# EAGLE board femto (EAGLE 6.4)
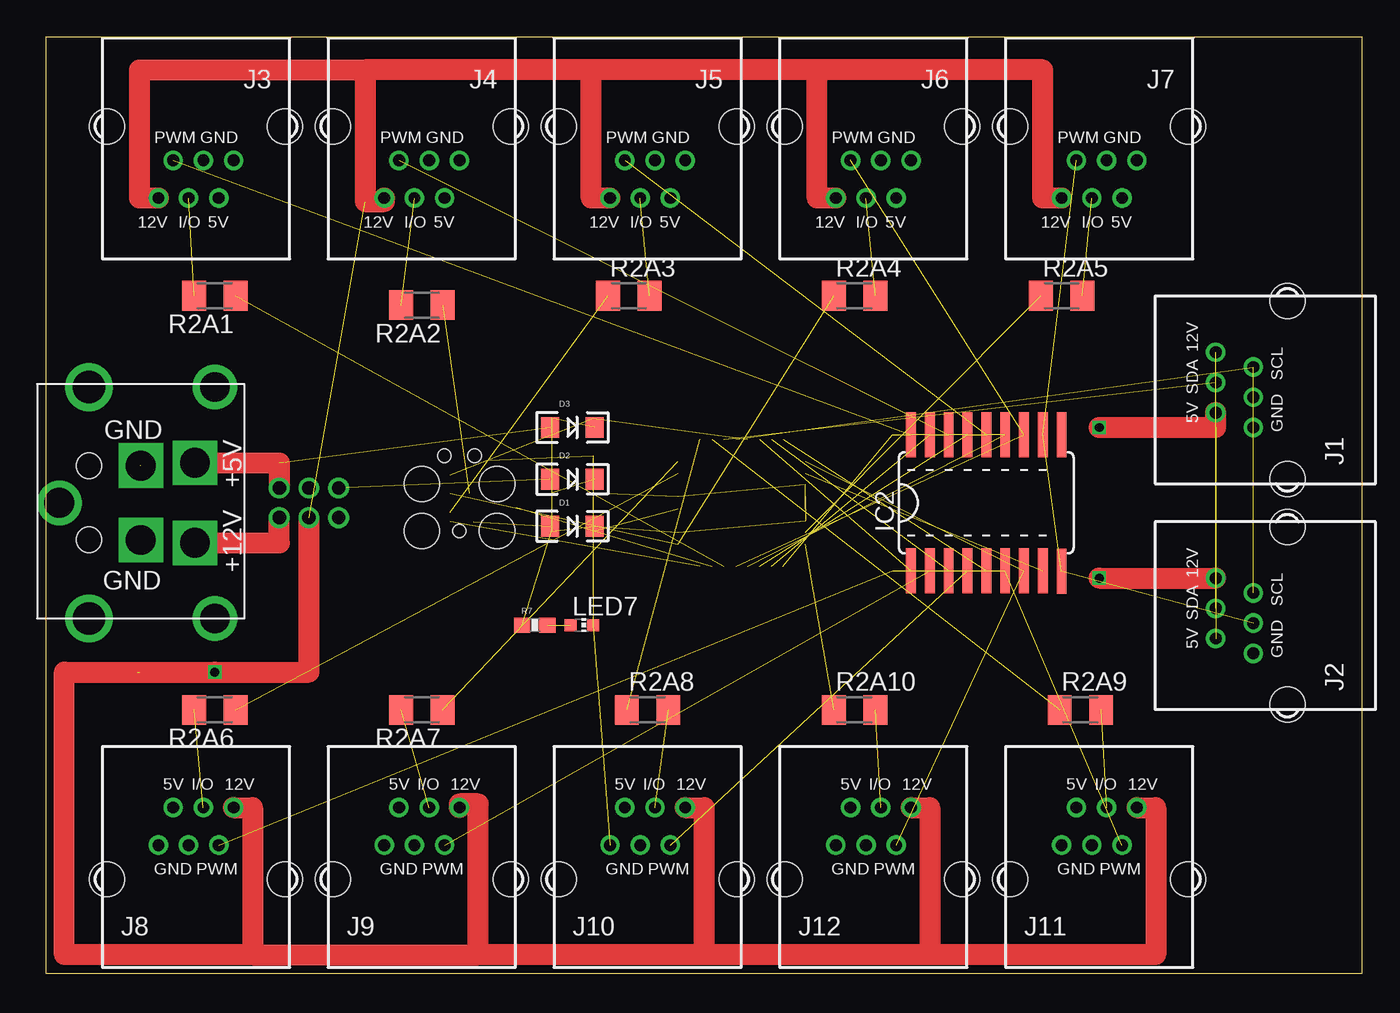
[diagram p0: board, top side]
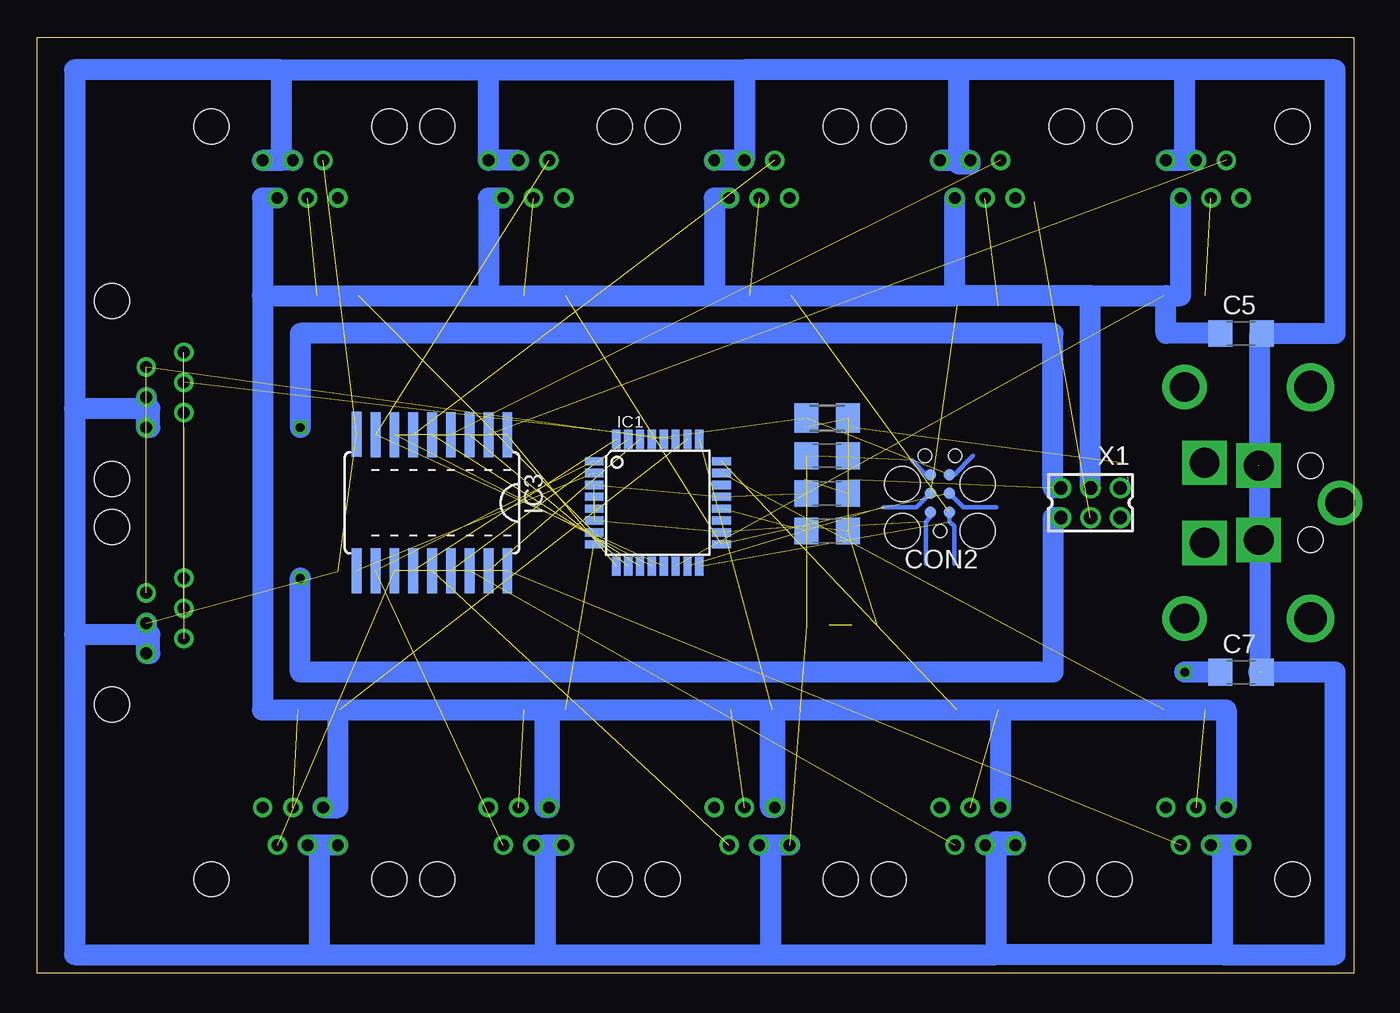
[diagram p1: board, bottom side, seen from below]

Size 88.89 x 63.17 mm. Coordinates in mm from the lower left corner, seen from the top.
Outline: 0,0 88.89,0 88.89,63.17 0,63.17 0,0
Copper layers (1*16): Top 0.035mm / dielectric 1.5mm / Bottom 0.035mm
Design rules "default": minimum track width 6mil, minimum drill 12mil, track to track 6mil, track to pad 6mil, pad to pad 6mil, via to via 6mil, smd to smd 0mil, copper to edge 10mil, drill to drill 10mil, minimum pad ring 10mil, minimum via ring 6mil, stop-mask expansion 2mil, vias tented up to drill 100mil, thermal gap 10mil
Net classes: 0 default: width 0.457 mm; 1 power: width 0.457 mm; 2 highpower: width 0.457 mm; 3 fine: width 0.305 mm
vRestrict: area 40.6,25.4 to 44.5,38.1; area 49.5,25.4 to 53.3,38.1; area 40.6,25.4 to 53.3,29.2; area 40.6,34.3 to 53.3,38.1; area 25.4,29.2 to 30.5,35.6; area 55.9,24.1 to 69.8,39.4

## Footprints (pad centres in the part's own frame; a part is rotated, then mirrored left to right if it is on the bottom)
C1206 = smd 1.6 x 1.8: 1 -1.4,0; 2 1.4,0
TC2030-MCP = smd 0.787 x 0.787: 5V 1.27,0.635; GND 3.81,0.635; MISO 1.27,-0.635; MOSI 2.54,0.635; RESET 3.81,-0.635; SCK 2.54,-0.635 | hole 0.889: 0,0; 5.08,-1.016; 5.08,1.016 | hole 2.375: 0,2.54; 0,-2.54; 3.175,-2.54; 3.175,2.54
LED-1206 = smd 1.2 x 1.4: A -1.5,0; C 1.5,0
TQFP32-08 = smd 1.27 x 0.559: 1 -4.293,2.8; 2 -4.293,2; 3 -4.293,1.2; 4 -4.293,0.4; 5 -4.293,-0.4; 6 -4.293,-1.2; 7 -4.293,-2; 8 -4.293,-2.8; 17 4.293,-2.8; 18 4.293,-2; 19 4.293,-1.2; 20 4.293,-0.4; 21 4.293,0.4; 22 4.293,1.2; 23 4.293,2; 24 4.293,2.8 | smd 0.559 x 1.27: 9 -2.8,-4.293; 10 -2,-4.293; 11 -1.2,-4.293; 12 -0.4,-4.293; 13 0.4,-4.293; 14 1.2,-4.293; 15 2,-4.293; 16 2.8,-4.293; 25 2.8,4.293; 26 2,4.293; 27 1.2,4.293; 28 0.4,4.293; 29 -0.4,4.293; 30 -1.2,4.293; 31 -2,4.293; 32 -2.8,4.293
SO18W = smd 0.66 x 3.048: 1 -5.08,-4.585; 2 -3.81,-4.585; 3 -2.54,-4.585; 4 -1.27,-4.585; 5 0,-4.585; 6 1.27,-4.585; 7 2.54,-4.585; 8 3.81,-4.585; 9 5.08,-4.623; 10 5.08,4.585; 11 3.81,4.585; 12 2.54,4.585; 13 1.27,4.585; 14 0,4.585; 15 -1.27,4.585; 16 -2.54,4.585; 17 -3.81,4.585; 18 -5.08,4.585
RJ12-RIGHTANGLE-I2C = drill 0.8 pad 1.3: +5V -1.54,4.84; +12V 2.54,4.84; GND1 -2.54,2.3; GND2 -0.5,2.3; SCL 1.54,2.3; SDA 0.5,4.84 | hole 2.36: -6,0; 6,0
RJ12-RIGHTANGLE = drill 0.8 pad 1.3: +5V -1.54,4.84; +12V 2.54,4.84; GND1 -2.54,2.3; GND2 -0.5,2.3; I/O 0.5,4.84; PWM 1.54,2.3 | hole 2.36: -6,0; 6,0
CHIP-LED0603 = smd 0.8 x 0.8: A 0,-0.75; C 0,0.75
M1206 = smd 1.6 x 2: 1 -1.4,0; 2 1.4,0
0603-RES = smd 1.1 x 1: 1 -0.85,0; 2 0.85,0
KPJX-4S-S = drill 2 square: +5V 2.7,1.35; +12V -2.7,1.35; GND1 -2.5,5; GND2 2.5,5 | drill 2: P$1 -7.8,0; P$2 7.8,0; P$11 0,10.5 | drill 2.2: P$3 -7.8,8.5; P$4 7.8,8.5 | hole 1.7: -2.5,8.5; 2.5,8.5
87758-0616 = drill 0.9 pad 1.27: 1 -2,-1; 2 -2,1; 3 0,-1; 4 0,1; 5 2,-1; 6 2,1

## Placement (x,y rotation side)
C1  0.1uF  [C1206]  35.56,29.84 180 bottom
C2  0.1uF  [C1206]  35.56,32.38 180 bottom
C3  10uF  [C1206]  35.56,34.92 180 bottom
C5  10uF  [C1206]  7.62,43.18 0 bottom
C7  10uF  [C1206]  7.62,20.32 0 bottom
CON2  [TC2030-MCP]  27.94,29.84 90 bottom
D1  1N581D1206  [LED-1206]  35.56,30.16 0 top
D2  1N581D1206  [LED-1206]  35.56,33.34 0 top
D3  1N581D1206  [LED-1206]  35.56,36.83 0 top
IC1  MEGA8-AI  [TQFP32-08]  46.99,31.75 0 bottom
IC2  [SO18W]  63.5,31.75 0 top
IC3  [SO18W]  62.23,31.75 180 bottom
J1  RJ12RIGHTANGLE-I2C  [RJ12-RIGHTANGLE-I2C]  83.82,39.37 90 top
J2  RJ12RIGHTANGLE-I2C  [RJ12-RIGHTANGLE-I2C]  83.82,24.13 90 top
J3  RJ12RIGHTANGLE  [RJ12-RIGHTANGLE]  10.16,57.15 180 top
J4  RJ12RIGHTANGLE  [RJ12-RIGHTANGLE]  25.4,57.15 180 top
J5  RJ12RIGHTANGLE  [RJ12-RIGHTANGLE]  40.64,57.15 180 top
J6  RJ12RIGHTANGLE  [RJ12-RIGHTANGLE]  55.88,57.15 180 top
J7  RJ12RIGHTANGLE  [RJ12-RIGHTANGLE]  71.12,57.15 180 top
J8  RJ12RIGHTANGLE  [RJ12-RIGHTANGLE]  10.16,6.35 0 top
J9  RJ12RIGHTANGLE  [RJ12-RIGHTANGLE]  25.4,6.35 0 top
J10  RJ12RIGHTANGLE  [RJ12-RIGHTANGLE]  40.64,6.35 0 top
J11  RJ12RIGHTANGLE  [RJ12-RIGHTANGLE]  71.12,6.35 0 top
J12  RJ12RIGHTANGLE  [RJ12-RIGHTANGLE]  55.88,6.35 0 top
LED7  [CHIP-LED0603]  36.2,23.5 270 top
R2A1  1k  [M1206]  11.43,45.72 180 top
R2A2  1k  [M1206]  25.4,45.09 180 top
R2A3  1k  [M1206]  39.37,45.72 0 top
R2A4  1k  [M1206]  54.61,45.72 0 top
R2A5  1k  [M1206]  68.58,45.72 0 top
R2A6  1k  [M1206]  11.43,17.78 180 top
R2A7  1k  [M1206]  25.4,17.78 180 top
R2A8  1k  [M1206]  40.64,17.78 0 top
R2A9  1k  [M1206]  69.85,17.78 0 top
R2A10  1k  [M1206]  54.61,17.78 0 top
R7  10k  [0603-RES]  33.02,23.5 0 top
R8  10k  [M1206]  35.56,37.47 0 bottom
U$1  KPJX-4S-S  [KPJX-4S-S]  11.43,31.75 90 top
X1  87758-0616  [87758-0616]  17.78,31.75 180 bottom

## Library data of the parts
C1-C3 R2A1-R2A10 R8 = resistor
C5 C7 = rcl
CON2 D1-D3 IC2 IC3 J1-J12 U$1 = lpatiny
IC1 = atmel; MPN: ATMEGA8-16AU; OC_FARNELL: 9171371; OC_NEWARK: 73M8863
LED7 = adafruit
R7 = SparkFun
X1 = con-molex; MPN: 87758-0616; OC_FARNELL: 7472323; OC_NEWARK: 25M5667

## Nets
5V_ISCP: CON2.5V D1.A
5V_UC [power]: C1.1 C2.1 C3.1 D1.C D2.C D3.C IC1.4 IC1.6 IC1.18 R7.1 R8.2
+5V [power]: C5.1 J3.+5V J4.+5V J5.+5V J6.+5V J7.+5V J8.+5V J9.+5V J10.+5V J11.+5V J12.+5V X1.3
+12V: C7.1 J3.+12V J4.+12V J5.+12V J6.+12V J7.+12V J8.+12V J9.+12V J10.+12V J11.+12V J12.+12V X1.4
A0: IC1.23 R2A6.1
A1: IC1.24 R2A7.1
A2: IC1.25 R2A8.1
A3: IC1.26 R2A9.1
A6: IC1.19
A7: IC1.22
D0: IC1.30 IC2.1 IC2.2
D1: IC1.31 IC2.3 IC2.4
D2: IC1.32 IC2.5 IC2.6
D3: IC1.1 IC2.7
D4: IC1.2 IC2.8
D5: IC1.9 IC3.1 IC3.2
D6: IC1.10 IC3.3 IC3.4
D7: IC1.11 IC3.5 IC3.6
D8: IC1.12 IC3.7
D9: IC1.13 IC3.8
D10: IC1.14 R2A1.1
EXT-5V [highpower]: D3.A U$1.+5V X1.1
EXT-12V [highpower]: U$1.+12V X1.2
GND [power]: C2.2 C3.2 C5.2 C7.2 CON2.GND IC1.3 IC1.5 IC1.21 IC2.9 IC3.9 J1.GND1 J1.GND2 J2.GND1 J2.GND2 J3.GND1 J3.GND2 J4.GND1 J4.GND2 J5.GND1 J5.GND2 J6.GND1 J6.GND2 J7.GND1 J7.GND2 J8.GND1 J8.GND2 J9.GND1 J9.GND2 J10.GND1 J10.GND2 J11.GND1 J11.GND2 J12.GND1 J12.GND2 LED7.C U$1.GND1 U$1.GND2
I2C-5V [power]: D2.A J1.+5V J2.+5V X1.5
I2C-12V: J1.+12V J2.+12V X1.6
MISO: CON2.MISO IC1.16 R2A3.1
MOSI: CON2.MOSI IC1.15 R2A2.1
N$2: J3.I/O R2A1.2
N$3: IC2.17 IC2.18 J3.PWM
N$4: C1.2 IC1.20
N$5: IC2.15 IC2.16 J4.PWM
N$6: IC2.13 IC2.14 J5.PWM
N$9: J4.I/O R2A2.2
N$10: J5.I/O R2A3.2
N$11: IC2.12 J6.PWM
N$12: J6.I/O R2A4.2
N$13: IC2.11 J7.PWM
N$14: J7.I/O R2A5.2
N$15: LED7.A R7.2
N$18: IC3.17 IC3.18 J8.PWM
N$19: IC3.15 IC3.16 J9.PWM
N$20: IC3.13 IC3.14 J10.PWM
N$21: J8.I/O R2A6.2
N$22: J9.I/O R2A7.2
N$23: J10.I/O R2A8.2
N$24: IC3.12 J11.PWM
N$25: J11.I/O R2A9.2
N$26: IC3.11 J12.PWM
N$27: J12.I/O R2A10.2
PB6: IC1.7 R2A5.1
PB7: IC1.8 R2A10.1
RESET: CON2.RESET IC1.29 R8.1
SCK: CON2.SCK IC1.17 R2A4.1
SCL [highpower]: IC1.28 J1.SCL J2.SCL
SDA [highpower]: IC1.27 J1.SDA J2.SDA

## Tracks (layer width: path | path; a pad name or v marks a point on that pad's centre or on a via)
5V_ISCP  (1 unrouted)
  Bottom 0.305: CON2.5V 28.57,30.8 28.89,30.48 28.89,27.62
5V_UC  (10 unrouted)
+5V
  Bottom 1.422: X1.3 17.78,45.72 | 17.78,45.72 12.7,45.72 | 12.7,45.72 11.7,45.72 J3.+5V | 17.78,45.72 26.94,45.72 | 26.94,45.72 J4.+5V | J5.+5V 43.18,52.31 43.18,45.72 | 43.18,45.72 26.94,45.72 | J6.+5V 58.42,52.31 58.42,45.72 | 58.42,45.72 43.18,45.72 | J7.+5V 73.66,52.31 73.66,45.72 | 73.66,45.72 58.42,45.72 | J11.+5V 68.58,11.19 68.58,17.78 | 68.58,17.78 54.61,17.78 | 54.61,17.78 54.34,17.78 | 54.34,17.78 J12.+5V 54.61,11.19 54.61,17.78 | 54.34,17.78 39.37,17.78 | 39.37,17.78 39.1,17.78 | 39.1,17.78 J10.+5V 39.37,11.19 39.37,17.78 | 39.1,17.78 23.86,17.78 | 23.86,17.78 J9.+5V | 23.86,17.78 8.62,17.78 J8.+5V | C5.1 12.7,43.18 12.7,45.72 | 73.66,45.72 73.66,17.78 68.58,17.78
+12V  (via drill 0.6)  (1 unrouted)
  Top 1.422: 13.97,1.27 29.21,1.27 | 29.21,1.27 29.21,11.43 27.94,11.43 J9.+12V | J10.+12V 44.45,11.19 44.45,1.27 | 44.45,1.27 29.21,1.27 | J12.+12V 59.69,11.19 59.69,1.27 | 59.69,1.27 44.45,1.27 | J11.+12V 74.93,11.19 74.93,1.27 59.69,1.27 | J3.+12V 6.35,52.31 6.35,60.96 21.59,60.96 | 21.59,60.96 21.59,52.07 22.86,52.07 J4.+12V | J5.+12V 36.83,52.31 36.83,60.96 | 36.83,60.96 21.59,60.96 | J6.+12V 52.07,52.31 52.07,60.96 | 52.07,60.96 36.83,60.96 | J7.+12V 67.31,52.31 67.31,60.96 52.07,60.96 | J8.+12V 13.97,11.19 13.97,1.27 | 13.97,1.27 1.27,1.27 1.27,20.32 v11.43,20.32 17.78,20.32 X1.4
  Bottom 1.422: C7.1 v11.43,20.32
A0  (1 unrouted)
A1  (1 unrouted)
A2  (1 unrouted)
A3  (1 unrouted)
D0  (2 unrouted)
D1  (2 unrouted)
D2  (2 unrouted)
D3  (1 unrouted)
D4  (1 unrouted)
D5  (2 unrouted)
D6  (2 unrouted)
D7  (2 unrouted)
D8  (1 unrouted)
D9  (1 unrouted)
D10  (1 unrouted)
EXT-5V  (1 unrouted)
  Top 1.422: U$1.+5V 15.78,34.45 X1.1
EXT-12V
  Top 1.422: U$1.+12V 15.78,29.05 X1.2
GND  (11 unrouted)
  Bottom 0.305: CON2.GND 28.89,33.66 29.84,34.61
  Bottom 1.422: J3.GND2 J3.GND1 11.43,54.85 11.43,60.96 | 11.43,60.96 26.67,60.96 | 26.67,54.85 26.67,54.61 25.9,54.61 J4.GND2 J4.GND1 26.67,54.85 | 26.67,54.85 26.67,60.96 | 26.67,60.96 41.14,60.96 | 41.14,60.96 J5.GND2 J5.GND1 | J6.GND2 J6.GND1 58.42,60.96 | 58.42,60.96 41.14,60.96 | 72.39,54.85 J7.GND2 J7.GND1 72.39,54.85 | 72.39,60.96 58.42,60.96 | 8.89,8.65 J8.GND2 J8.GND1 8.89,8.65 | 8.89,1.27 24.13,1.27 | 24.13,1.27 24.13,8.89 22.86,8.89 J9.GND1 J9.GND2 | J10.GND1 J10.GND2 39.37,8.65 39.37,1.27 | 39.37,1.27 24.13,1.27 | J12.GND2 J12.GND1 54.61,8.65 54.61,1.27 | 54.61,1.27 39.37,1.27 | J11.GND1 J11.GND2 69.85,8.65 69.85,1.27 | 69.85,1.27 54.61,1.27 | J2.GND2 J2.GND1 81.28,21.59 81.28,22.86 86.36,22.86 | 86.36,22.86 86.36,1.27 69.85,1.27 | J1.GND2 J1.GND1 81.28,36.83 81.28,38.1 86.36,38.1 | 86.36,38.1 86.36,22.86 | 72.39,54.85 72.39,60.96 | 72.39,60.96 86.36,60.96 86.36,38.1 | 8.89,8.65 8.89,1.27 | 8.89,1.27 1.27,1.27 1.27,20.32 6.35,20.32 | 6.35,20.32 6.43,20.32 | 6.35,29.25 6.35,34.29 | 6.35,34.29 6.43,34.29 | 6.35,34.29 6.35,43.18 C5.2 1.27,43.18 1.27,60.96 11.43,60.96 | U$1.GND1 6.35,29.25 | 6.35,29.25 6.35,20.32
I2C-5V  (via drill 0.6)  (2 unrouted)
  Top 1.422: v71.12,36.83 78.98,36.83 J1.+5V
  Bottom 1.422: X1.5 20.32,32.75 20.32,43.18 71.12,43.18 v71.12,36.83
I2C-12V  (via drill 0.6)  (1 unrouted)
  Top 1.422: v71.12,26.67 J2.+12V
  Bottom 1.422: X1.6 20.32,30.75 20.32,20.32 71.12,20.32 v71.12,26.67
MISO  (2 unrouted)
  Bottom 0.305: CON2.MISO 27.3,30.48 26.99,30.16 26.99,27.62
MOSI  (2 unrouted)
  Bottom 0.305: CON2.MOSI 29.53,31.43 31.75,31.43
N$2  (1 unrouted)
N$3  (2 unrouted)
N$4  (1 unrouted)
N$5  (2 unrouted)
N$6  (2 unrouted)
N$9  (1 unrouted)
N$10  (1 unrouted)
N$11  (1 unrouted)
N$12  (1 unrouted)
N$13  (1 unrouted)
N$14  (1 unrouted)
N$15  (1 unrouted)
N$18  (2 unrouted)
N$19  (2 unrouted)
N$20  (2 unrouted)
N$21  (1 unrouted)
N$22  (1 unrouted)
N$23  (1 unrouted)
N$24  (1 unrouted)
N$25  (1 unrouted)
N$26  (1 unrouted)
N$27  (1 unrouted)
PB6  (1 unrouted)
PB7  (1 unrouted)
RESET  (2 unrouted)
  Bottom 0.305: CON2.RESET 26.99,33.66 25.72,34.92
SCK  (2 unrouted)
  Bottom 0.305: CON2.SCK 26.35,31.43 24.13,31.43
SCL  (2 unrouted)
SDA  (2 unrouted)